# Altium PCB PIR Sensor driver v4.PcbDoc
Units mm, origin at the board's own origin, x right, y up, seen from the top; angles counter-clockwise.
Board outline 152.4 x 101.6 mm, 2 copper layers (Top Layer, Bottom Layer); 13 components, 11 nets, 42 pads, 2 vias.
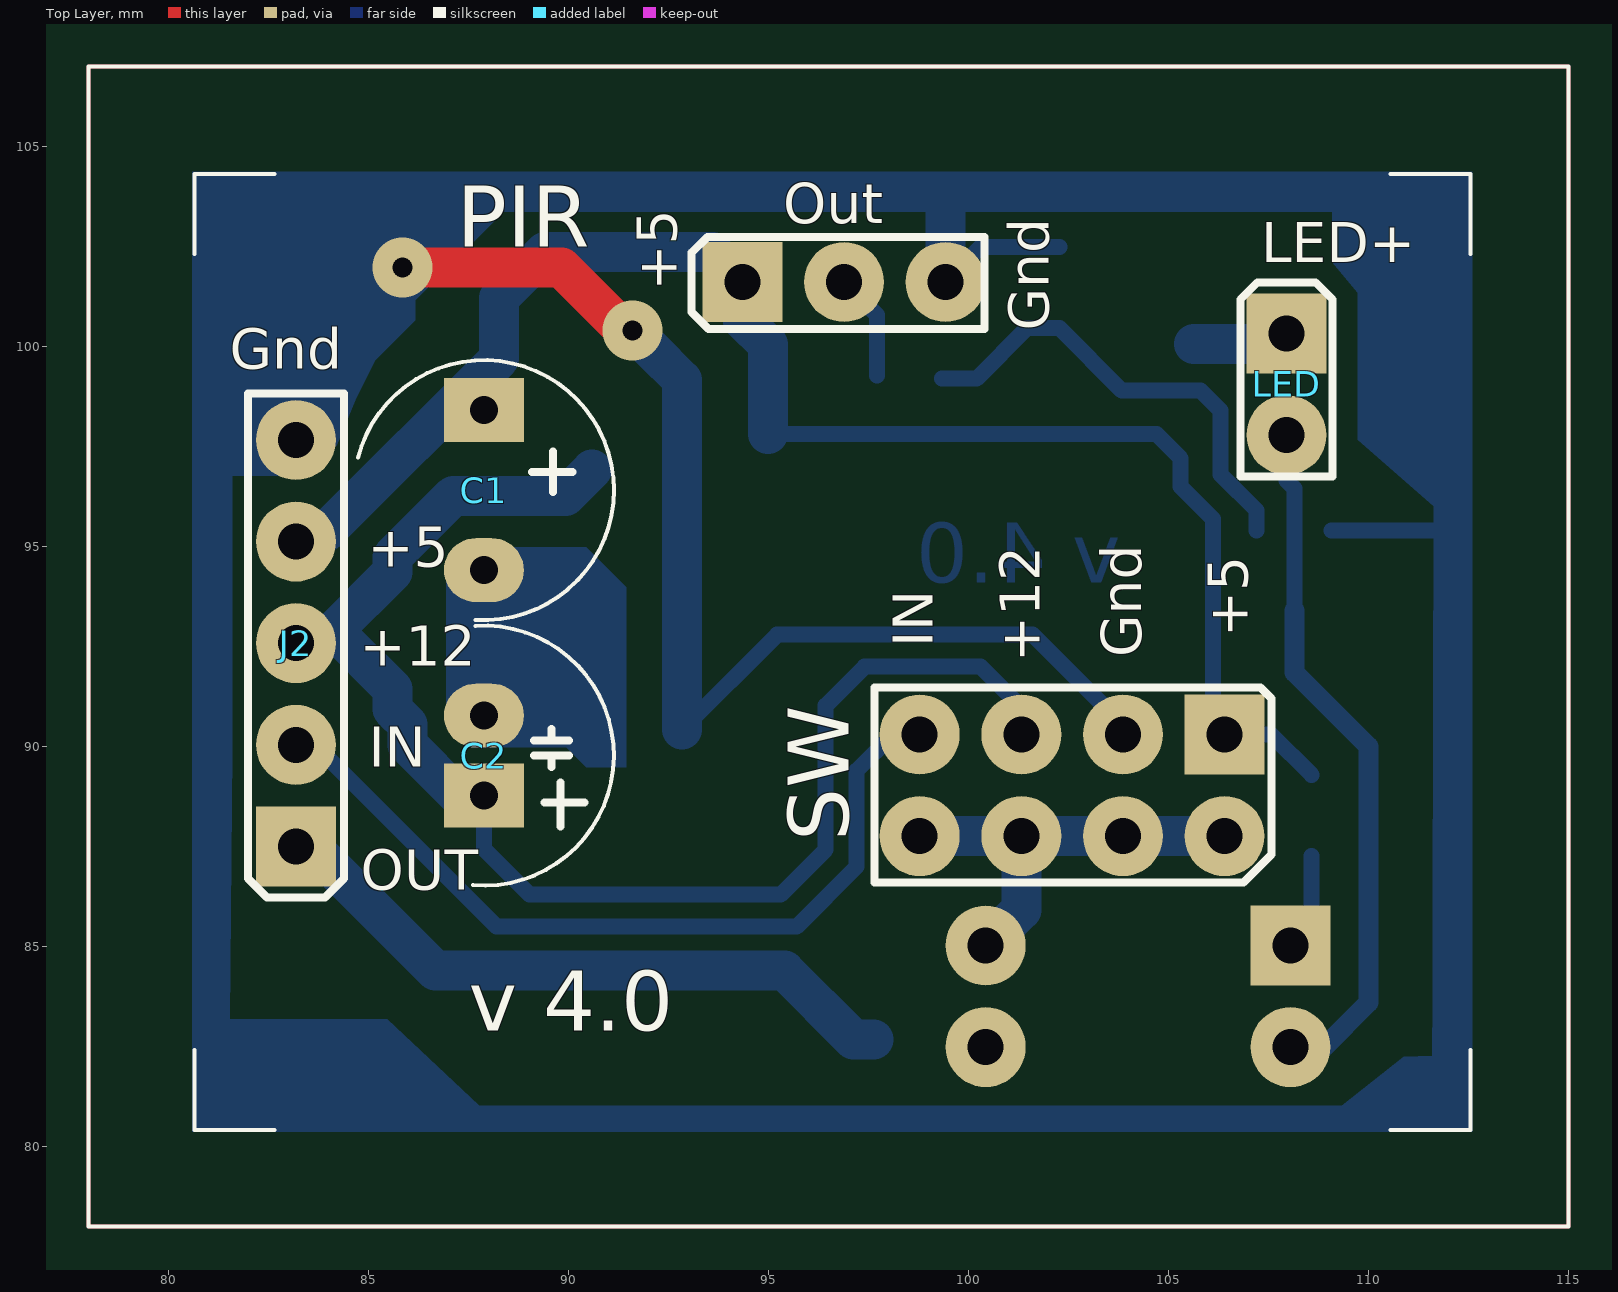
[diagram p0: Top Layer view]
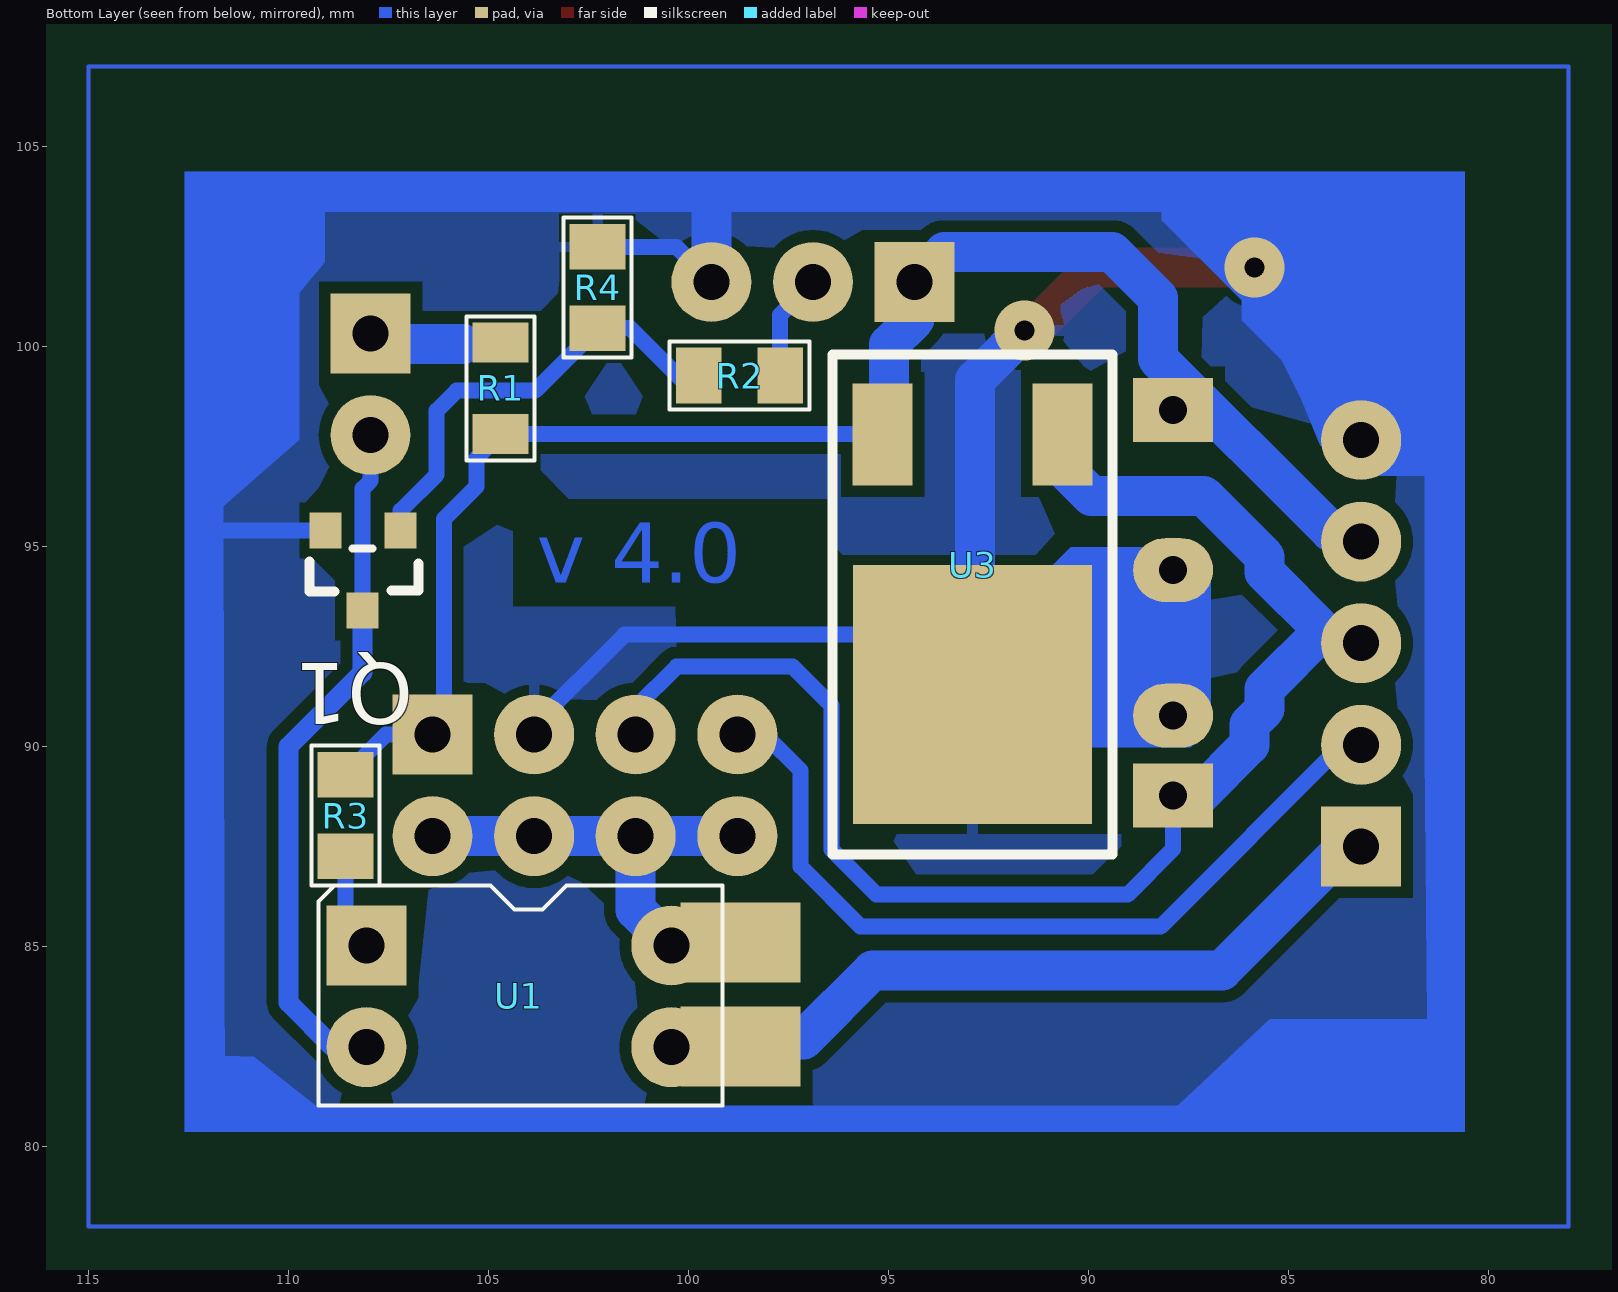
[diagram p1: Bottom Layer view, seen from below]
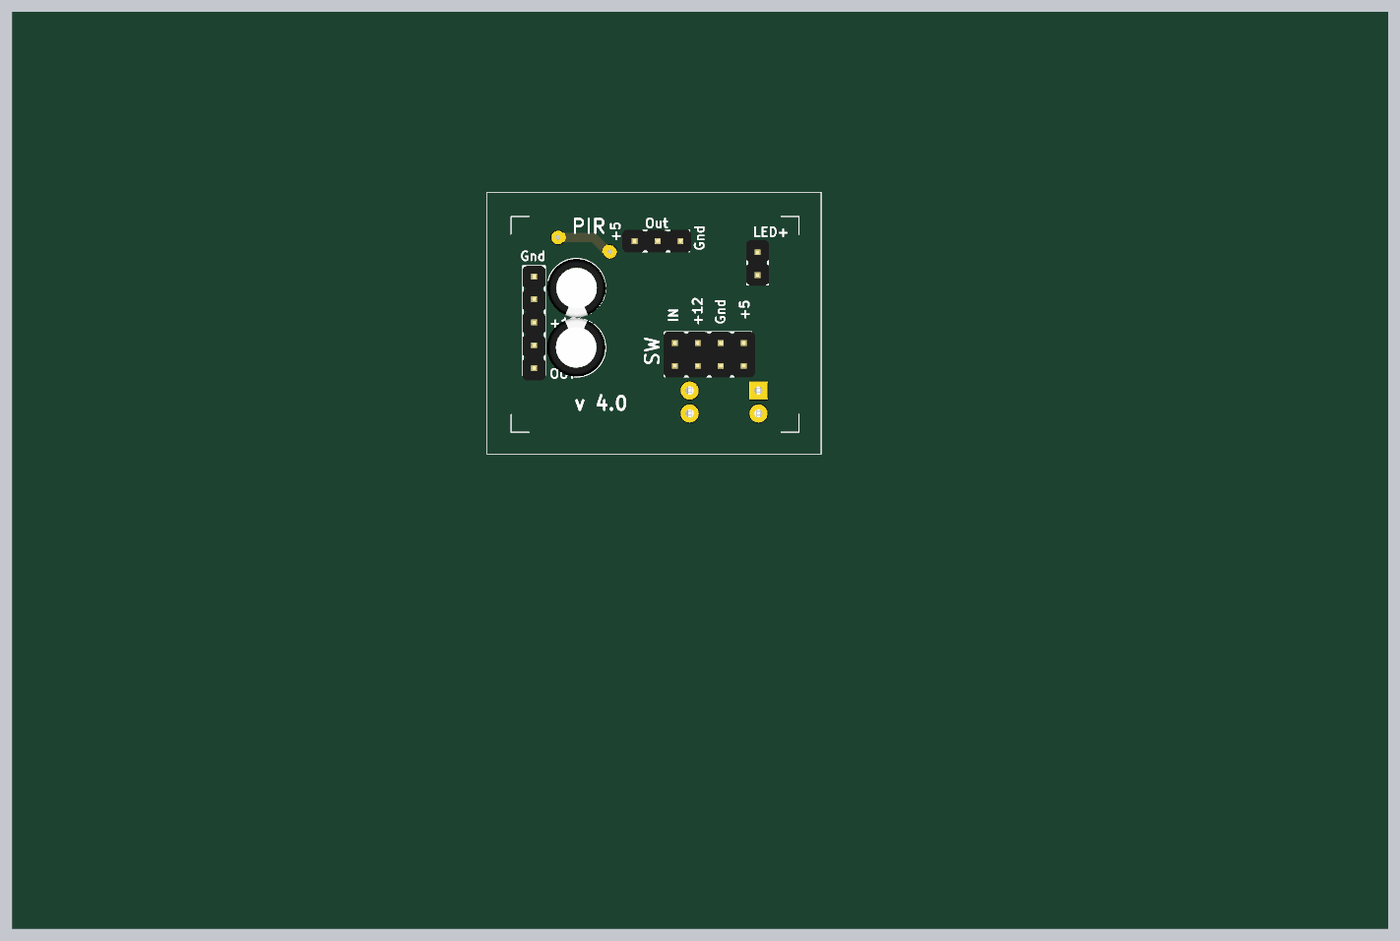
[diagram p2: 3D render of the assembled board from above, using the file's embedded part models]
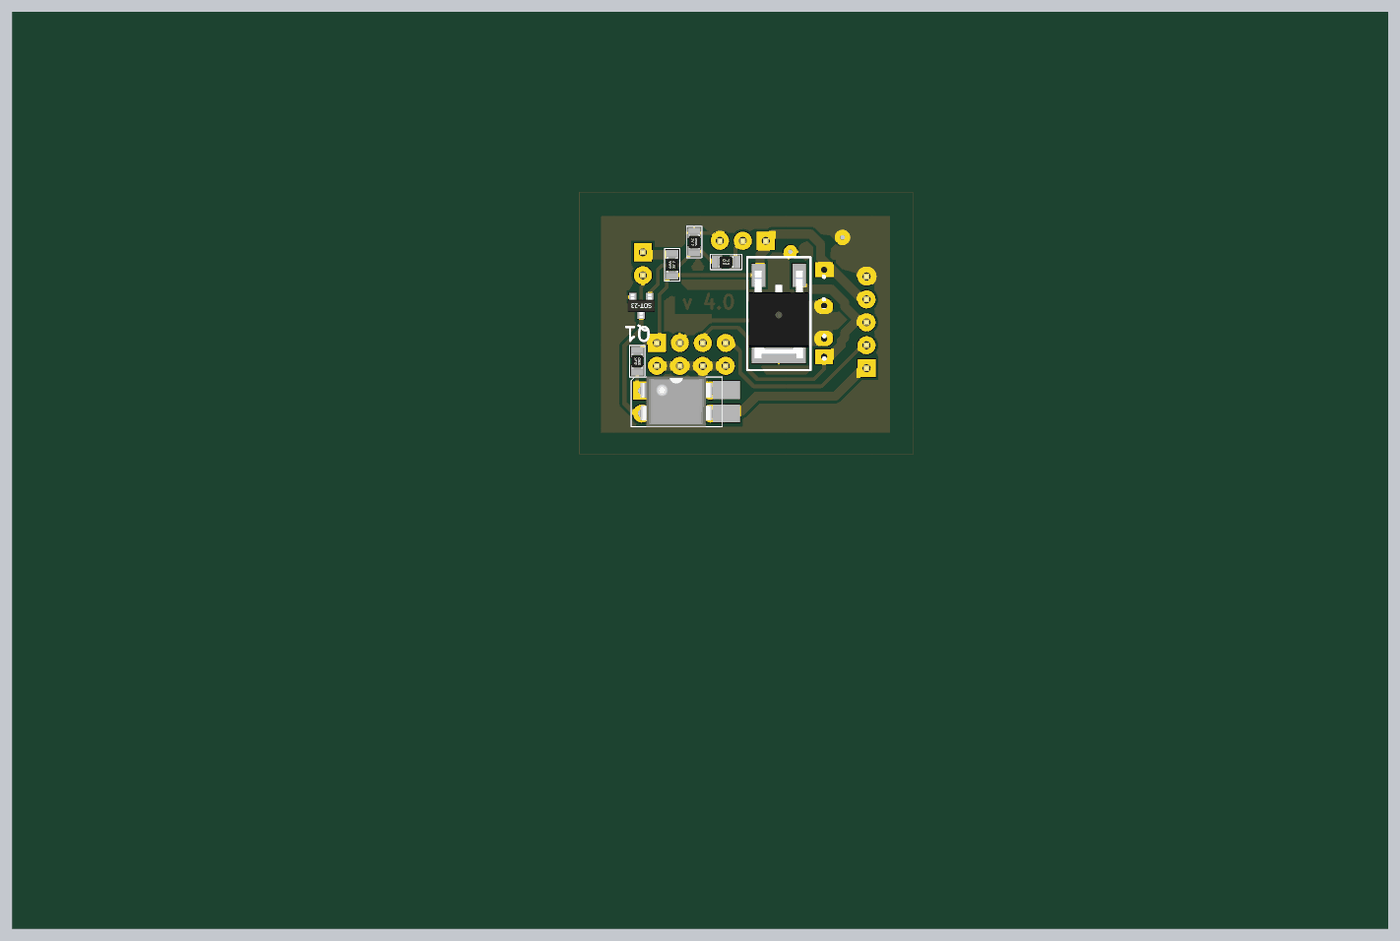
[diagram p3: 3D render of the assembled board from below, using the file's embedded part models]

## Layer stack, top to bottom
Top Solder: solder mask 0.0102, Solder Resist, Dk 3.5
Top Layer: signal copper 0.0356
Dielectric 1: dielectric 0.32, FR-4, Dk 4.8
Bottom Layer: signal copper 0.0356
Bottom Solder: solder mask 0.0102, Solder Resist, Dk 3.5

## Board outline
25.4,25.4 177.8,25.4 177.8,127 25.4,127

## Design rules (kind name [scope] priority, off if disabled: settings)
Clearance [All] p1: gap=0.3
ComponentClearance [All] p1: gap=0 collisioncheckmode=3 verticalgap=0 showdistances=FALSE
PolygonConnect [All] p1: connectstyle=Relief reliefconductorwidth=0.254 reliefentries=4 polygonreliefangle="90 Angle" airgapwidth=0.254
RoutingVias [All] p1: holewidth=0.711 width=1.27 viastyle="Through Hole" minholewidth=0.711 minwidth=1.27 maxholewidth=0.711 maxwidth=1.27
SolderMaskExpansion [All] p1: expansion=0.102
Width [All] p1: maxlimit=2 minlimit=0.3 preferedwidth=1
28 further rules are at their usual default settings.

## Components (designator, comment, footprint, x,y, rotation, side; value= is the part's Value field where it differs from the comment)
C1 "220mF 16v" "Cap E p4mm D6.5xH11" 87.884,97.409 r270 top
C2 "220mF 16v" "Cap E p2mm D6.5xH11" 87.884,88.773 r90 top
J2 "Interface" "Line 2.54 x 5 - (D2mm)" 83.185,87.503 r180 top
LED "IR LED (AlarmIndicator)" "Line 2.54 x 2" 107.95,100.33 r0 top
PIR "PIR Sensor" "Line 2.54 X 3" 94.348,101.615 r90 top
Q1 "BC817-40" SOT-23 107.2,95.4 r0 bottom
R1 "560Om" "SMD 0805 (2012) Long" 104.7,97.8 r90 bottom
R2 "1 kOm" "SMD 0805 (2012)" 97.7,99.3 r0 bottom
R3 "560 Om" "SMD 0805 (2012)" 108.6,89.3 r270 bottom
R4 "10kOm" "SMD 0805 (2012)" 102.3,102.5 r270 bottom
SW "Power Switch" "Line 2.54 X 8D (2 x 4)" 106.4,90.3 r270 top
U1 "Optocouplier" DIP-4 108.05,85.025 r180 bottom
U3 "7805C" D-PAK 92.9,91.3 r90 bottom

## Footprints (in the part's own frame and the unit in brackets; to place one, negate y for a bottom-side part, rotate by r counter-clockwise, add the part's x,y. Pads: shape width x height; smd on the part's side, far side on the other; paste and mask are expansions set on the pad)
"Cap E p2mm D6.5xH11" [mm] "D 6.5mm; H 11mm"
  rect 1.6x2 hole 0.7: 1(0,0)
  oval 1.6x2 hole 0.7: 2(2,0)
  silkscreen extent -2.25,-3.25 4.25,0.27, body extent -2.22,-3.22 4.27,3.28, height 11.49
"Cap E p4mm D6.5xH11" [mm] "D 6.5mm; H 11mm"
  rect 1.6x2 hole 0.7: 1(-1,0)
  oval 1.6x2 hole 0.7: 2(3,0)
  silkscreen extent -2.25,-3.15 4.25,3.25, body extent -2.22,-3.22 4.27,3.28, height 11.49
D-PAK [mm]
  rect 2.54x1.5 smd: 1(6.5,-2.25) 3(6.5,2.25)
  rect 6.48x5.97 smd: 2(0,0)
  silkscreen extent -4,-3.5 8.5,3.5, body extent -2.7,-3.29 7,3.29, height 2.3
DIP-4 [mm]
  rect 2x2 hole 0.9: 1(0,0)
  round 2 hole 0.9: 2(0,-2.54) 3(7.62,0) 4(7.62,-2.54)
  silkscreen extent -1.2,-4 8.9,1.5, body extent -0.2,-4 7.8,1.54, height 4.31
"Line 2.54 x 2" [mm]
  rect 2x2 hole 0.9: 1(0,0)
  round 2 hole 0.9: 2(0,-2.54)
  silkscreen extent -1.15,-3.57 1.15,1.28, body extent -1.25,-3.69 1.25,1.39, height 8.3
"Line 2.54 X 3" [mm]
  rect 2x2 hole 0.9: 1(0,0)
  round 2 hole 0.9: 2(0,-2.54) 3(0,-5.08)
  silkscreen extent -1.17,-6.05 1.12,1.27, body extent -1.27,-6.24 1.22,1.38, height 8.2
"Line 2.54 x 5 - (D2mm)" [mm]
  rect 2x2 hole 0.9: 1(0,0)
  round 2 hole 0.9: 2(0,-2.54) 3(0,-5.08) 4(0,-7.62) 5(0,-10.16)
  silkscreen extent -1.2,-11.32 1.2,1.28, body extent -1.25,-11.33 1.25,1.37, height 8.2
"Line 2.54 X 8D (2 x 4)" [mm]
  rect 2x2 hole 0.9: 1(0,0)
  round 2 hole 0.9: 2(2.54,0) 3(0,-2.54) 4(2.54,-2.54) 5(0,-5.08) 6(2.54,-5.08) 7(0,-7.62) 8(2.54,-7.62)
  silkscreen extent -1.17,-8.75 3.7,1.17, body extent -1.27,-8.88 3.81,1.28, height 8.6
"SMD 0805 (2012)" [mil]
  rect 45x55 smd: 1(0.35,0.98) 2(80.35,0.98)
  silkscreen extent -29,-32 109,34, body extent 1,-24 80,26, height 18
"SMD 0805 (2012) Long" [mm]
  rect 1x1.4 smd: 1(0.009,0) 2(2.3,0)
  silkscreen extent -0.65,-0.85 2.95,0.85, body extent 0.15,-0.62 2.15,0.63, height 0.45
SOT-23 [mm]
  rect 0.8x0.9 smd: 1(0,0) 2(1.875,0) 3(0.95,2)
  silkscreen extent -0.45,0.45 2.27,1.53, body extent -0.57,-0.32 2.43,2.32, height 1.08

## Part data
C1 C2: library part "Cap E 220mF x 16V", "Capacitor"
J2: library part PLS-5, "Vert, Sgl line, Male"
LED: library part PLS-2, "Vert, Sgl line, Male"
PIR: library part PLS-3, "Vert, Sgl line, Male"
Q1: "NPN 45 V, 500 mA NPN general-purpose transistor"
R1 R4: library part "Res All Types"
R2 R3: library part "Res SMD 0805"
SW: library part "PLD-8 (2 x 4)", "Vert, Sgl line, Male"
U1: library part "Optocouplier LTV 817B"
U3: "Voltage Regulator"

## Free pads (board coordinates)
  rect 3x2 smd far side: 11(98.7,82.5) 12(98.7,85.1)

## Via types
v1: diameter 1.5, hole 0.5, Top Layer to Bottom Layer, 2 vias

## Nets (pads, with @x,y where several pads share a name; then routed paths per layer and width w, separated by ;. In a path a pad name is that pad's centre, name@x,y a point inside that pad or via, vN(x,y) a via of type N, cw(c..) or ccw(c..) an arc to the next point about the centre after c; other vN are vias at no path point)
+5V: C1.1 J2.4 PIR.1 R1.1 R3.1 SW.1 U3.3 | length 39.1
  Bottom Layer w0.4: U3.3@94.983,97.809 R1.1 105.304,97.204 105.304,96.496 106.115,95.685 106.115,91.185 106.4,90.9 SW.1 107.566,90.3 R3.1
  Bottom Layer w1: J2.4@83.947,95.377 88.265,99.695 88.265,101.219 89.408,102.362 93.601,102.362 PIR.1 94.348,100.685 94.983,100.05 U3.3@94.983,97.809
+12V: C2.1 J2.3 SW.5 U3.1 | length 35.2
  Bottom Layer w0.4: C2.1 87.884,87.441 89.025,86.3 95.3,86.3 96.425,87.425 96.425,91.025 97.4,92 100.3,92 101.32,90.98 SW.5
  Bottom Layer w1: C2.1 87.249,88.773 85.979,90.043 85.979,90.551 85.598,90.932 85.598,91.44 84.138,92.9 85.598,94.361 85.598,94.742 87.122,96.266 89.929,96.266 U3.1@90.587,96.924
"ALARM IN": J2.2 SW.7 | length 20.9
  Bottom Layer w0.4: J2.2 83.657,90.043 88.2,85.5 95.7,85.5 97.2,87 97.2,89.4 98.1,90.3 SW.7
"ALARM OUT": J2.1 pad.11 U1.4 | length 16.3
  Bottom Layer w1: J2.1@83.693,87.757 83.693,87.376 86.669,84.4 95.4,84.4 97.123,82.677 pad.11@97.623,82.677
GND: C1.2 C2.2 J2.5 PIR.3 Q1.2 R4.1 SW.3 U3.2 | length 37.6
  Top Layer w1: v1(85.852,101.981) 89.819,101.981 v1@91.567,100.233
  Bottom Layer w0.4: U3.2@92.837,90.424 95.213,92.8 101.6,92.8 103.86,90.54 SW.3 ; PIR.3 100.304,102.491 R4.1 ; Q1.2 111.9,95.4
  Bottom Layer w1: v1@92.051,99.949 92.837,99.163 U3.2@92.837,90.424 ; PIR.3 99.428,103.746
  other v1: 91.6,100.4
NetLED_1: LED.1 R1.2 | length 2.4
  Bottom Layer w1: 105.639,100.067 107.687,100.067 LED.1
NetQ1_1: Q1.1 R2.2 R4.2 | length 11.7
  Bottom Layer w0.4: R2.2@99.341,99.2 100.2,99.2 101.459,100.459 R4.2 103.834,98.9 105.8,98.9 106.3,98.4 106.3,96.8 107.2,95.9 Q1.1
NetR3_2: R3.2 U1.1 | length 2.5
  Bottom Layer w0.4: U1.1 108.575,85.55 R3.2
NetSW_2: pad.12 SW.2 SW.4 SW.6 SW.8 U1.3 | length 10.7
  Bottom Layer w1: SW.8 SW.6 ; U1.3 101.32,85.915 SW.6 ; SW.2 SW.4 SW.6
"SENSOR OUT": PIR.2 R2.1 | length 2.7
  Bottom Layer w0.4: PIR.2 97.709,100.794 R2.1
"SENSOR OUT P": LED.2 Q1.3 U1.2 | length 17.5
  Bottom Layer w0.4: LED.2 107.95,96.65 108.15,96.45 Q1.3
  Bottom Layer w0.5: U1.2 108.885,82.485 110,83.6 110,90 108.15,91.85 Q1.3

## Polygon pours and split planes (outlines as drawn)
GND on Bottom Layer "Top Layer-No Net" (solid, pour order 2): 112.598,80.365 112.598,104.365 80.598,104.365 80.598,80.365

## Other copper
Bottom Layer:
  region net GND: 88.171,104.161 88.171,103.161 86.171,101.161 86.171,100.661 85.171,99.661 84.671,98.661 84.201,97.536 83.185,96.774 80.645,96.774 80.671,104.161
  region net GND: 86.94,94.48 86.94,90.48 87.44,89.98 89.94,89.98 90.44,89.48 91.44,89.48 91.44,93.98 90.44,94.98 87.94,94.98
  region net GND: 80.598,104.365 80.598,80.365 111.598,80.365 111.6,82.275 110.875,82.25 109.325,81.025 87.757,81.026 85.471,83.185 81.534,83.185 81.598,89.865 81.598,100.365 84.598,100.365 84.598,103.365 109.098,103.365 109.093,102.108 109.728,101.346 109.728,97.663 111.633,96.012 111.598,80.365 112.598,80.365 112.598,104.365
  text "v 4.0" at 103.8,94.1 h1.5
Multi-Layer:
  lines w0.1: 78,78 115,78 115,107 78,107 78,78

## Silkscreen, mask and mechanical layers (free items; w line width, h text height)
Top Overlay:
  lines w0.1: 80.649,82.413 80.649,80.413 82.649,80.413 ; 80.649,102.313 80.649,104.313 82.649,104.313 ; 110.549,80.413 112.549,80.413 112.549,82.413 ; 110.549,104.313 112.549,104.313 112.549,102.313 ; 78,78 115,78 115,107 78,107 78,78
  lines w0.2: 89.4,88.6 90.4,88.6 ; 89.8,88 89.8,89.1
  text "Out" at 95.371,103.08 h1
  text "LED+" at 107.315,102.108 h1
  text "+5" at 92.7,101.4 h1 r90
  text "Gnd" at 102,100.4 h1 r90
  text "Gnd" at 81.534,99.441 h1
  text "+5" at 84.975,94.5 h1
  text "+5" at 106.985,92.737 h1 r90
  text "IN" at 99.111,92.483 h1 r90
  text "Gnd" at 104.318,92.229 h1 r90
  text "+12" at 101.778,92.102 h1 r90
  text "+12" at 84.775,92.025 h1
  text "IN" at 85,89.5 h1
  text "OUT" at 84.8,86.425 h1
  text "v 4.0" at 87.5,82.9 h1.5